# Altium PCB TPSM84824_PCB.PcbDoc
Units mm, origin at the board's own origin, x right, y up, seen from the top; angles counter-clockwise.
Board outline 53.47 x 43.69 mm, 2 copper layers (Top Layer, Bottom Layer); 11 components, 7 nets, 74 pads, 0 vias.
Unrouted connection lines stored in the file: 7.
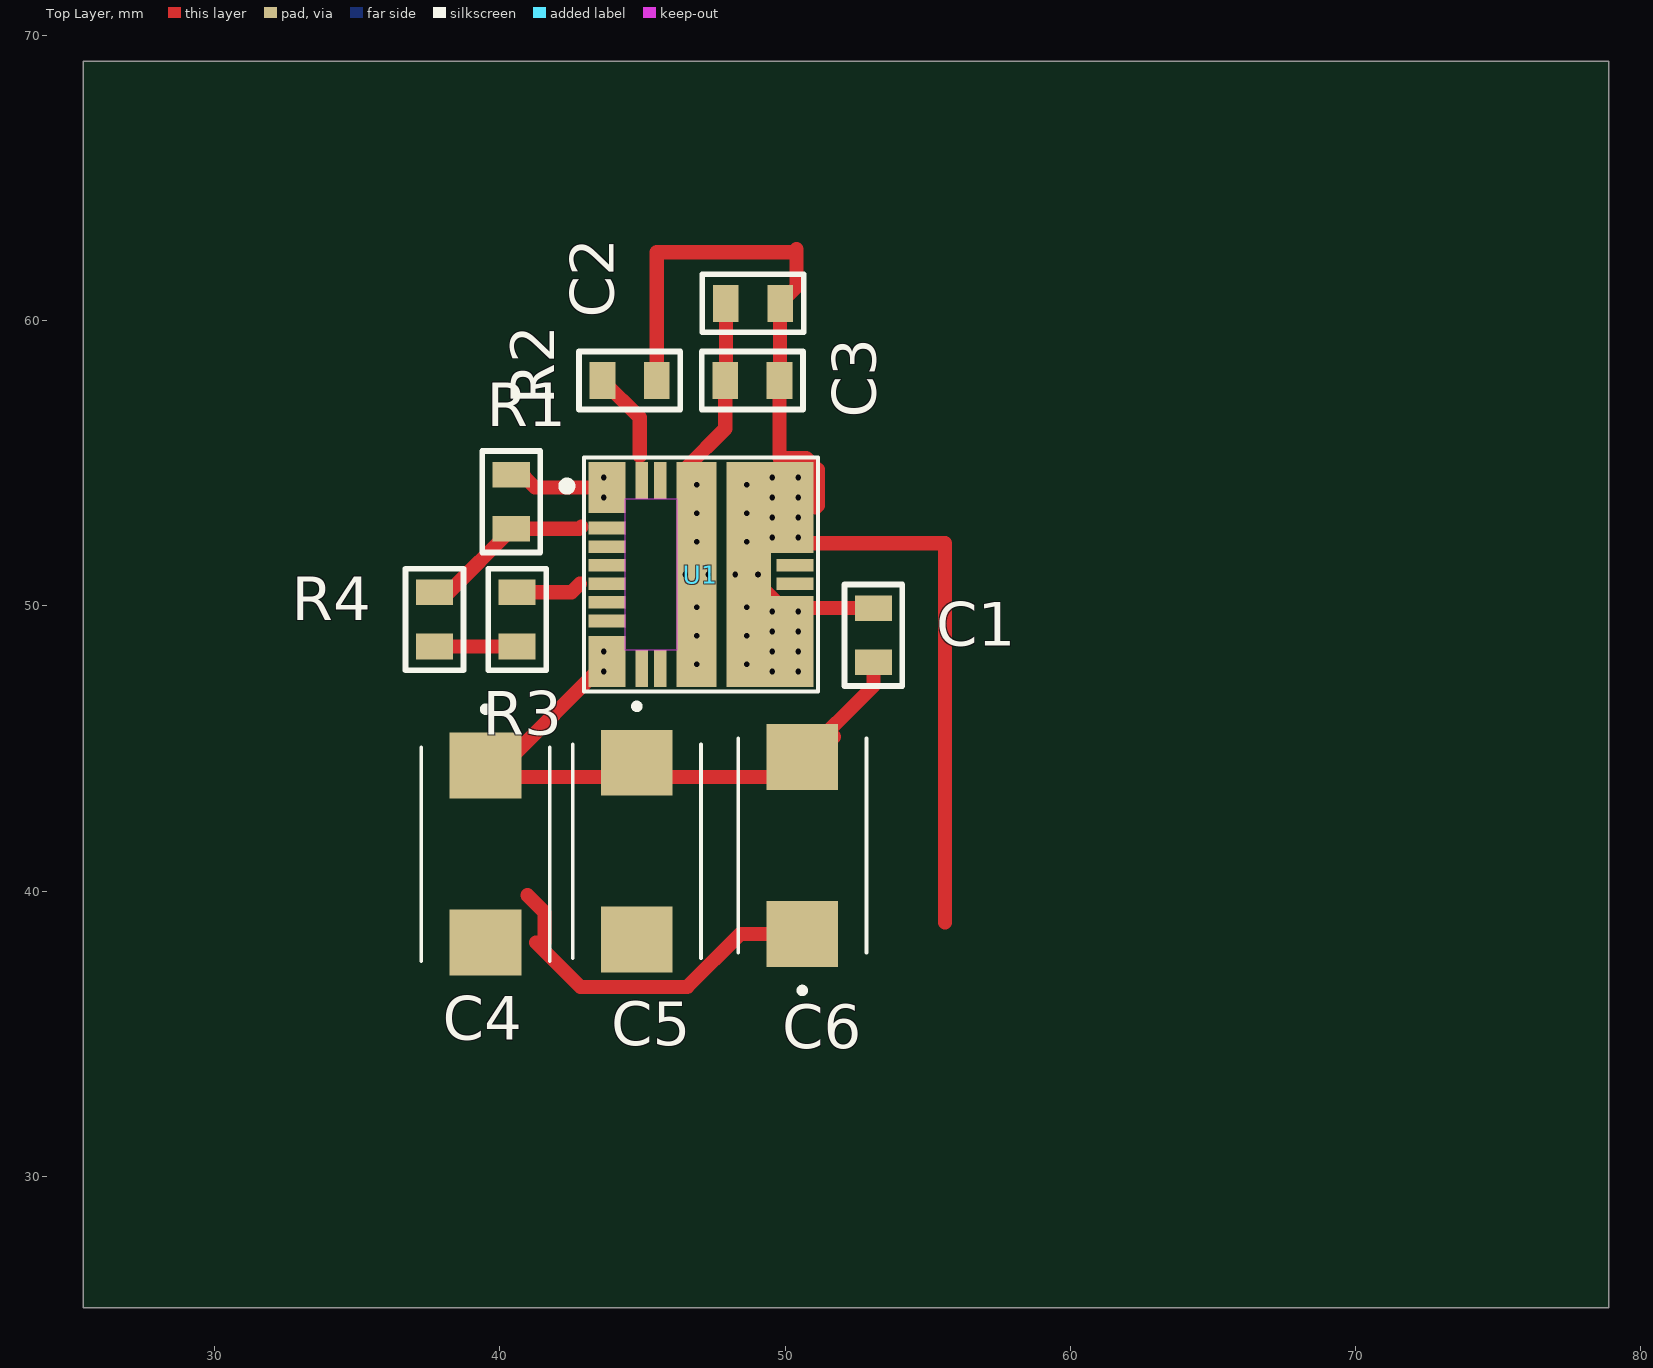
[diagram p0: Top Layer view]
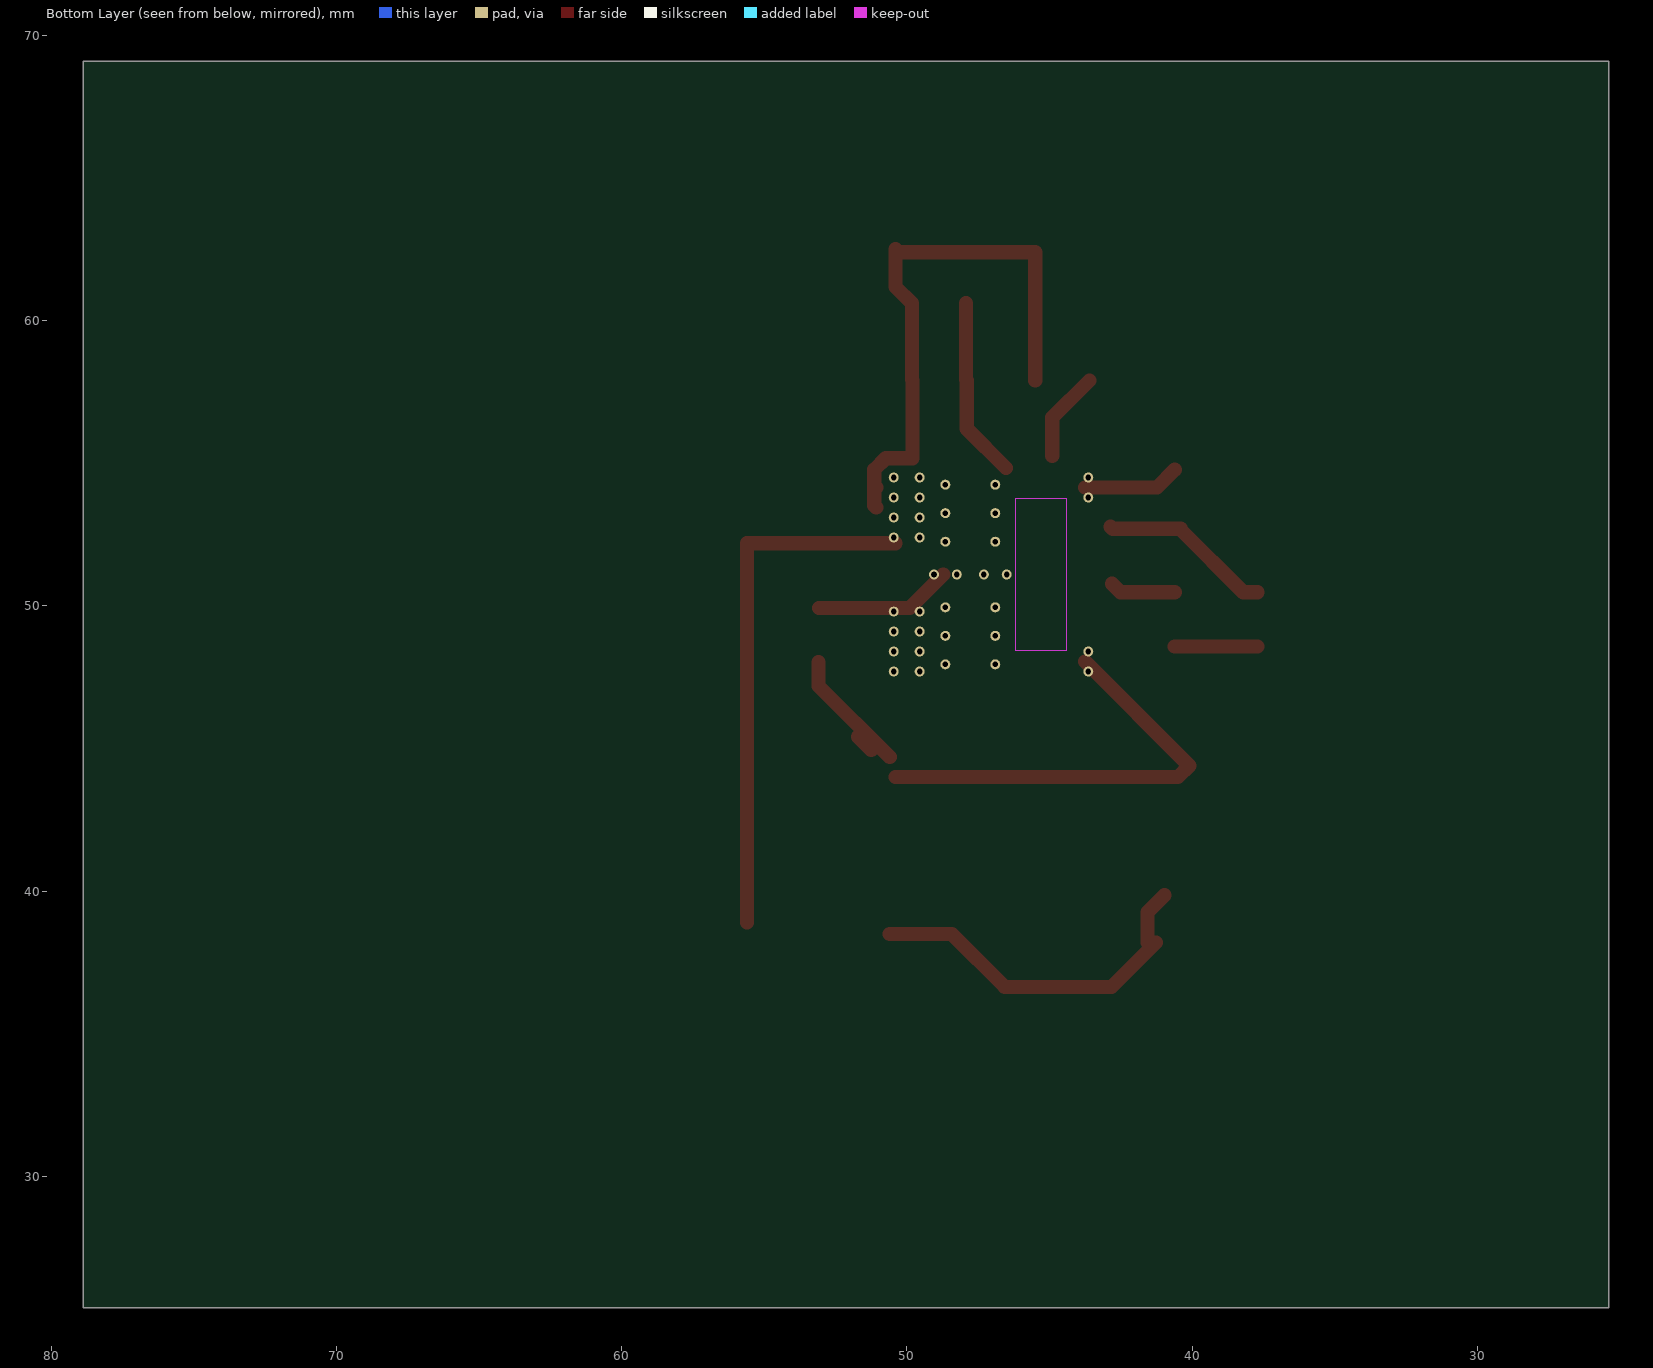
[diagram p1: Bottom Layer view, seen from below]
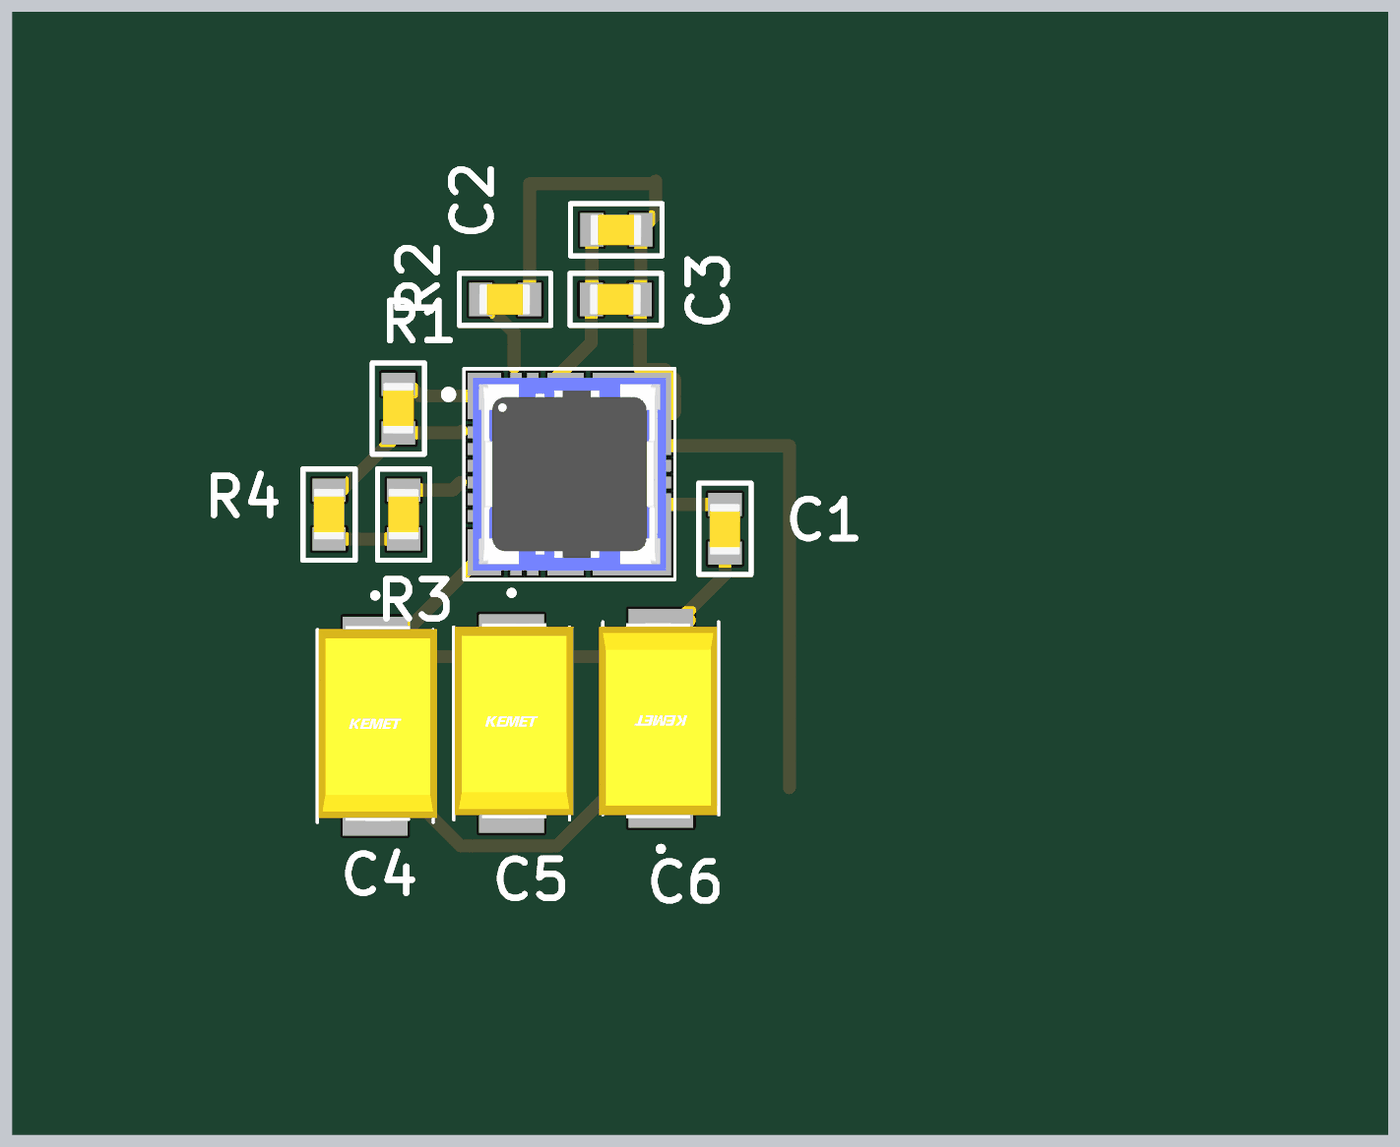
[diagram p2: 3D render of the assembled board from above, using the file's embedded part models]

## Layer stack, top to bottom
Top Solder: solder mask 0.0102, Solder Resist, Dk 3.5
Top Layer: signal copper 0.0356
Dielectric 1: dielectric 0.32, FR-4, Dk 4.8
Bottom Layer: signal copper 0.0356
Bottom Solder: solder mask 0.0102, Solder Resist, Dk 3.5

## Board outline
25.4,25.4 78.867,25.4 78.867,69.088 25.4,69.088

## Design rules (kind name [scope] priority, off if disabled: settings)
Clearance [All] p1: gap=0.254 ignorepadtopadclearanceinfootprint=FALSE except(0: Arc-Hole Track-Hole SMDPad-Hole THPad-Hole Via-Hole Fill-Hole Poly-Hole Region-Hole Text-Hole)
PolygonConnect [All] p1: connectstyle=Relief reliefconductorwidth=0.254 reliefentries=4 polygonreliefangle="90 Angle" airgapwidth=0.254
RoutingVias [All] p1: holewidth=0.711 width=1.27 viastyle="Through Hole" minholewidth=0.711 minwidth=1.27 maxholewidth=0.711 maxwidth=1.27
SolderMaskExpansion [All] p1: expansion=0.102
Width [All] p1: maxlimit=1 minlimit=0.254 preferedwidth=0.254
30 further rules are at their usual default settings.

## Components (designator, comment, footprint, x,y, rotation, side; value= is the part's Value field where it differs from the comment)
C1 "47µF" C/R0805 53.1,48.9 r270 top
C2 "10uF" C/R0805 48.8,60.6 r180 top
C3 "10uF" C/R0805 48.777,57.894 r180 top
C4 "10uF_New" CAPPM7343X310N 39.5,41.3 r270 top
C5 "10uF_New" CAPPM7343X310N 44.8,41.4 r270 top
C6 "10uF_New" CAPPM7343X310N 50.6,41.6 r90 top
R1 "10 kOhms" C/R0805 40.394,53.723 r90 top
R2 "40.2kohm" C/R0805 44.477,57.894 r180 top
R3 "4.42kohm" C/R0805 40.6,49.6 r90 top
R4 "1.37 kOhms" C/R0805 37.7,49.6 r90 top
U1 "TPSM84824MOL" TPSM84424MOLR 47.05,51.1 r0 top

## Footprints (in the part's own frame and the unit in brackets; to place one, negate y for a bottom-side part, rotate by r counter-clockwise, add the part's x,y. Pads: shape width x height; smd on the part's side, far side on the other; paste and mask are expansions set on the pad)
C/R0805 [mm]
  rect 0.9x1.3 smd: 1(-1.023,-0.006) 2(0.877,-0.006)
  silkscreen extent -1.85,-1.02 1.71,1.01, body extent -1.06,-0.61 0.94,0.59, height 0.96
CAPPM7343X310N [mm]
  rect 2.31x2.52 smd: 1(-3.1,0) 2(3.1,0)
  silkscreen extent -5.18,-2.25 3.75,2.25, body extent -3.9,-2.2 3.7,2.4, height 3.11
TPSM84424MOLR [mm]
  rect 1.3x1.8 smd: 1(-3.3,3.05) 8(-3.3,-3.05)
  round 0.35 hole 0.2: 1.1(-3.41,3.4) 1.2(-3.41,2.7) 8.1(-3.41,-2.7) 8.2(-3.41,-3.4) 11.1(-0.15,-3.15) 11.2(-0.15,-2.15) 11.3(-0.15,-1.15) 11.4(-0.15,1.15) 11.5(-0.15,2.15) 11.6(-0.15,3.15) 11.7(-0.55,0) 11.8(0.25,0) G1(1.6,-1.15) G2(1.2,0) G3(2,0) G4(1.6,1.15) G5(1.6,2.15) G6(1.6,3.15) G7(1.6,-2.15) G8(1.6,-3.15) G9(2.5,-3.4) G10(2.5,-2.7) G11(2.5,-2) G12(2.5,-1.3) G13(3.41,-1.3) G14(3.41,-2) G15(2.5,2) G16(2.5,1.3) G18(2.5,2.7) G19(2.5,3.4) G20(3.41,3.4) G21(3.41,2.7) G22(3.41,2) G23(3.41,1.3) G24(3.41,-2.7) G25(3.41,-3.4)
  rect 1.3x0.45 smd: 2(-3.3,1.625) 3(-3.3,0.975) 4(-3.3,0.325) 5(-3.3,-0.325) 6(-3.3,-0.975) 7(-3.3,-1.625) 16(3.3,-0.325) 17(3.3,0.325)
  rect 0.45x1.3 smd: 9(-2.075,-3.3) 10(-1.425,-3.3) 23(-1.425,3.3) 24(-2.075,3.3)
  rect 1.4x7.9 smd: 11(-0.15,0)
  rect 1.5x3.2 smd: 13(3.2,-2.35) 20(3.2,2.35)
  rect 1.55x7.9 smd: 21(1.675,0)
  Keep-Out Layer region: -2.651,2.65 -0.85,2.65 -0.85,-2.651 -2.651,-2.651
  Keep-Out Layer region: -2.651,2.65 -0.85,2.65 -0.85,-2.651 -2.651,-2.651
  Keep-Out Layer region: -2.651,2.65 -0.85,2.65 -0.85,-2.651 -2.651,-2.651
  silkscreen extent -4.85,-4.1 4.1,4.1, body extent -3.75,-3.75 3.75,3.75, height 5.4

## Part data
C1: library part GRM21BR60J476ME15K, "47μF 6.3V Ceramic Capacitor X5R 0805 (2012 Metric) 0.079\" L x 0.049\" W (2.00mm x 1.25mm)", Capacitance=47μF, Manufacturer=Murata, Operating Temperature="-55°C ~ 85°C", Package / Case="0805 (2012 Metric)", Ratings=-, Temperature Coefficient=X5R, Tolerance=±20%, Voltage - Rated=6.3V, Applications="General Purpose", Categories=Capacitors, ComponentLink1Description=http://www.mouser.com/ds/2/281/c02e-2905.pdf?src-supplier=Mouser, ComponentLink1URL=http://www.mouser.com/ds/2/281/c02e-2905.pdf?src-supplier=Mouser, ComponentLink2Description=https://search.murata.co.jp/Ceramy/image/img/A01X/G101/ENG/GRM21BR60J476ME15-01.pdf?src-supplier=Digi-Key, ComponentLink2URL=https://search.murata.co.jp/Ceramy/image/img/A01X/G101/ENG/GRM21BR60J476ME15-01.pdf?src-supplier=Digi-Key, Features=-, Height - Seated (Max)=-, Lead Spacing=-, Lead Style=-, Manufacturer Part Number=GRM21BR60J476ME15K, Mounting Type="Surface Mount, MLCC", Packaging="Tape & Reel (TR)", Part Status="Not For New Designs", Pricing 1="1=0.48, 10=0.339, 100=0.2236, 500=0.1656, 1000=0.1408, 2500=0.1325, 5000=0.1242 (USD)", Series=GRM, Size / Dimension="0.079 L x 0.049 W (2.00mm x 1.25mm)", Stock 1=16872, Supplier 1=Digi-Key, Thickness (Max)="0.057 (1.45mm)"
C2 C3: library part C0805C106K8PACTU, "CAP CER 10UF 10V X5R 0805", Capacitance Value="10 uF", Dielectric=X5R, Manufacturer=KEMET, Operating Temperature="-55 to 85 °C", Package/Case=0805, Tolerance="10 %", Voltage="10 Vdc", Category="Capacitor Ceramic Multilayer", ComponentLink1Description=http://www.farnell.com/datasheets/2739827.pdf?src-supplier=Element14, ComponentLink1URL=http://www.farnell.com/datasheets/2739827.pdf?src-supplier=Element14, ComponentLink2Description=http://www.farnell.com/datasheets/40889.pdf?src-supplier=Element14, ComponentLink2URL=http://www.farnell.com/datasheets/40889.pdf?src-supplier=Element14, Construction=Flat, Manufacturer Part Number=C0805C106K8PACTU, Mounting="Surface Mount", Pricing 1="1=0.16, 10=0.117, 100=0.055, 500=0.0386, 1000=0.0319 (USD)", Product Height="1.25 mm", Product Length="2 mm", Stock 1=872414, Supplier 1=Digi-Key
C4 C5 C6: library part T495D106M035ATE125, "CAP TANT 10UF 35V 20% 2917", Capacitance=10μF, Capacitance Tolerance="± 20%", Capacitor Case Style="2917 ^7343 Metric]", Manufacturer=KEMET, Operating Temperature Max=125°C, Operating Temperature Min=-55°C, Voltage Rating=35V, ComponentLink1Description=https://www.verical.com/server-webapp/html/getDatasheet?partID=44813&src-supplier=Verical, ComponentLink1URL=https://www.verical.com/server-webapp/html/getDatasheet?partID=44813&src-supplier=Verical, ComponentLink2Description=http://www.farnell.com/datasheets/1761160.pdf?src-supplier=Element14, ComponentLink2URL=http://www.farnell.com/datasheets/1761160.pdf?src-supplier=Element14, ComponentLink3Description=http://www.farnell.com/datasheets/1744560.pdf?src-supplier=Element14, ComponentLink3URL=http://www.farnell.com/datasheets/1744560.pdf?src-supplier=Element14, ESR=0.125ohm, Manufacturer Part Number=T495D106M035ATE125, Packaging="Full Reel", Pricing 1="1=1.79, 10=1.449, 100=1.1066 (USD)", Product Range="KEMET - T495 Series", Stock 1=5675, Supplier 1=Digi-Key
R1: library part RC0805FR-0710KL, "RES SMD 10K OHM 1% 1/8W 0805", Case Code - in=0805, Case Code - mm=2012, Manufacturer=Yageo, Operating Temperature Range="- 55 C to + 155 C", Power Rating="125 mW (1/8 W)", Temperature Coefficient="100 PPM / C", Tolerance="1 %", Voltage Rating="150 V", ComponentLink1Description=http://www.yageo.com/documents/recent/PYu-RC_Group_51_RoHS_L_9.pdf?src-supplier=Mouser, ComponentLink1URL=http://www.yageo.com/documents/recent/PYu-RC_Group_51_RoHS_L_9.pdf?src-supplier=Mouser, ComponentLink2Description=http://www.farnell.com/datasheets/2167052.pdf?src-supplier=Element14, ComponentLink2URL=http://www.farnell.com/datasheets/2167052.pdf?src-supplier=Element14, ComponentLink3Description=http://www.yageo.com/documents/recent/PYu-RC_Group_51_RoHS_L_10.pdf?src-supplier=Digi-Key, ComponentLink3URL=http://www.yageo.com/documents/recent/PYu-RC_Group_51_RoHS_L_10.pdf?src-supplier=Digi-Key, ComponentLink4Description=http://www.yageo.ru/pdf/RC0805.pdf?src-supplier=Future+Electronics, ComponentLink4URL=http://www.yageo.ru/pdf/RC0805.pdf?src-supplier=Future+Electronics, Manufacturer Part Number=RC0805FR-0710KL, Packaging=Reel, Pricing 1="1=0.1, 10=0.036, 100=0.0147, 1000=0.0066, 2500=0.0057 (USD)", Product="Thick Film Resistors General Purpose", Resistance="10 kOhms", Series=RC, Stock 1=37419702, Supplier 1=Digi-Key, Termination Style=SMD/SMT
R2: library part ERA-6AEB4022V, "Res Thin Film 0805 40.2K Ohm 0.1% 1/8W 25ppm/C Molded SMD SMD Punched Carrier T/R", Manufacturer=Panasonic, Operating Temperature Max=155°C, Operating Temperature Min=-55°C, Operating Temperature Range="-55°C to +155°C", Power Rating=125mW, Resistance Tolerance="± 0.1%", Resistor Case Style="0805 [2012 Metric]", Resistor Element Material="Thin Film", Resistor Mounting=SMD, Temperature Coefficient="± 25ppm/°C", Voltage Rating=100V, ComponentLink1Description=http://uk.rs-online.com/webdocs/0eb1/0900766b80eb1d8c.pdf?src-supplier=RSComponents, ComponentLink1URL=http://uk.rs-online.com/webdocs/0eb1/0900766b80eb1d8c.pdf?src-supplier=RSComponents, ComponentLink2Description=http://industrial.panasonic.com/www-data/pdf/AOA0000/AOA0000CE26.pdf?src-supplier=Avnet+Europe, ComponentLink2URL=http://industrial.panasonic.com/www-data/pdf/AOA0000/AOA0000CE26.pdf?src-supplier=Avnet+Europe, ComponentLink3Description=http://www.farnell.com/datasheets/485442.pdf?src-supplier=Farnell, ComponentLink3URL=http://www.farnell.com/datasheets/485442.pdf?src-supplier=Farnell, ComponentLink4Description=http://www.farnell.com/datasheets/485442.pdf?src-supplier=Element14, ComponentLink4URL=http://www.farnell.com/datasheets/485442.pdf?src-supplier=Element14, ComponentLink5Description=http://www.mouser.com/ds/2/315/AOA0000CE26-32660.pdf?src-supplier=Mouser, ComponentLink5URL=http://www.mouser.com/ds/2/315/AOA0000CE26-32660.pdf?src-supplier=Mouser, ComponentLink6Description=http://industrial.panasonic.com/www-data/pdf/AOA0000/AOA0000CE26.pdf?src-supplier=Avnet, ComponentLink6URL=http://industrial.panasonic.com/www-data/pdf/AOA0000/AOA0000CE26.pdf?src-supplier=Avnet, ComponentLink7Description=https://produktinfo.conrad.com/datenblaetter/450000-474999/458496-da-01-en-WIDERSTAND_0805_ERA.pdf?src-supplier=Conrad, ComponentLink7URL=https://produktinfo.conrad.com/datenblaetter/450000-474999/458496-da-01-en-WIDERSTAND_0805_ERA.pdf?src-supplier=Conrad, External Depth=1.25mm, External Length / Height=0.5mm, External Width=2mm, Manufacturer Part Number=ERA-6AEB4022V, No. of Pins=2, Packaging=Reel, Pricing 1="1=0.36, 10=0.302, 100=0.1182, 1000=0.0495, 2500=0.0454 (USD)", Product Range="PANASONIC - ERA Series Metal Film Chip Resistor", Resistance=40.2kohm, Series=ERA, Stock 1=45354, Supplier 1=Digi-Key
R3: library part ERA-6AEB4421V, "Panasonic ERA Series Thin Film Surface Mount Fixed Resistor 0805 Case 4.42k 0.1% 0.125W 25ppm/C", Manufacturer=Panasonic, Operating Temperature Max=155°C, Operating Temperature Min=-55°C, Operating Temperature Range="-55°C to +155°C", Power Rating=125mW, Resistance Tolerance="± 0.1%", Resistor Case Style="0805 [2012 Metric]", Resistor Element Material="Thin Film", Resistor Mounting=SMD, Temperature Coefficient="± 25ppm/°C", Voltage Rating=100V, ComponentLink1Description=http://uk.rs-online.com/webdocs/0eb1/0900766b80eb1d8c.pdf?src-supplier=RSComponents, ComponentLink1URL=http://uk.rs-online.com/webdocs/0eb1/0900766b80eb1d8c.pdf?src-supplier=RSComponents, ComponentLink2Description=http://www.farnell.com/datasheets/485442.pdf?src-supplier=Farnell, ComponentLink2URL=http://www.farnell.com/datasheets/485442.pdf?src-supplier=Farnell, ComponentLink3Description=http://www.farnell.com/datasheets/485442.pdf?src-supplier=Element14, ComponentLink3URL=http://www.farnell.com/datasheets/485442.pdf?src-supplier=Element14, ComponentLink4Description=http://industrial.panasonic.com/www-data/pdf/AOA0000/AOA0000CE26.pdf?src-supplier=Avnet, ComponentLink4URL=http://industrial.panasonic.com/www-data/pdf/AOA0000/AOA0000CE26.pdf?src-supplier=Avnet, ComponentLink5Description=http://www.produktinfo.conrad.com/datenblaetter/1100000-1199999/001181285-da-01-en-WIDERSTAND_ERA_0805_4K42_0_1__5000ST.pdf?src-supplier=Conrad, ComponentLink5URL=http://www.produktinfo.conrad.com/datenblaetter/1100000-1199999/001181285-da-01-en-WIDERSTAND_ERA_0805_4K42_0_1__5000ST.pdf?src-supplier=Conrad, External Depth=1.25mm, External Length / Height=0.5mm, External Width=2mm, Manufacturer Part Number=ERA-6AEB4421V, No. of Pins=2, Packaging=Reel, Pricing 1="1=0.36, 10=0.302, 100=0.1182, 1000=0.0495, 2500=0.0454 (USD)", Product Range="PANASONIC - ERA", Resistance=4.42kohm, Series=ERA, Stock 1=10445, Supplier 1=Digi-Key
R4: library part RC0805FR-071K37L, "RES SMD 1.37K OHM 1% 1/16W 0402", Case Code - in=0402, Case Code - mm=1005, Manufacturer=Vishay, Manufacturer Part Number=CRCW04021K37FKED, Operating Temperature Range="- 55 C to + 155 C", Package / Case="0402 (1005 metric)", Power Rating="63 mW", Temperature Coefficient="100 PPM / K", Tolerance="1 %", Voltage Rating="50 V", Brand="Vishay / Dale", ComponentLink1Description=http://www.vishay.com/docs/20035/dcrcwe3.pdf?src-supplier=Digi-Key, ComponentLink1URL=http://www.vishay.com/docs/20035/dcrcwe3.pdf?src-supplier=Digi-Key, ComponentLink2Description=http://www.vishay.com/docs/20035/dcrcwe3.pdf?src-supplier=Avnet, ComponentLink2URL=http://www.vishay.com/docs/20035/dcrcwe3.pdf?src-supplier=Avnet, ComponentLink3Description=http://www.farnell.com/datasheets/1697337.pdf?src-supplier=Element14, ComponentLink3URL=http://www.farnell.com/datasheets/1697337.pdf?src-supplier=Element14, ComponentLink4Description=http://www.farnell.com/datasheets/2310790.pdf?src-supplier=Farnell, ComponentLink4URL=http://www.farnell.com/datasheets/2310790.pdf?src-supplier=Farnell, ComponentLink5Description=http://www.mouser.com/ds/2/427/dcrcwe3-109170.pdf?src-supplier=Mouser, ComponentLink5URL=http://www.mouser.com/ds/2/427/dcrcwe3-109170.pdf?src-supplier=Mouser, ComponentLink6Description=http://www.farnell.com/datasheets/2111203.pdf?src-supplier=Element14, ComponentLink6URL=http://www.farnell.com/datasheets/2111203.pdf?src-supplier=Element14, ComponentLink7Description=http://www.vishay.com/docs/20035/dcrcwe3.pdf?src-supplier=Future+Electronics, ComponentLink7URL=http://www.vishay.com/docs/20035/dcrcwe3.pdf?src-supplier=Future+Electronics, ComponentLink8Description=http://www.farnell.com/datasheets/2045674.pdf?src-supplier=Element14, ComponentLink8URL=http://www.farnell.com/datasheets/2045674.pdf?src-supplier=Element14, ComponentLink9Description=https://www.alliedelec.com/m/d/0c934d6939ccefa68dbe0b96d821c8cf.pdf?src-supplier=Allied+Electronics, ComponentLink9URL=https://www.alliedelec.com/m/d/0c934d6939ccefa68dbe0b96d821c8cf.pdf?src-supplier=Allied+Electronics, Factory Pack Quantity=10000, Height="0.35 mm", Length="1 mm", Packaging=Reel, Pricing 1="1=0.1, 10=0.038, 100=0.0154, 1000=0.0069, 2500=0.006, 5000=0.005 (USD)", Product="Thick Film Resistors SMD", Product Category="Thick Film Resistors - SMD", Resistance="1.37 kOhms", RoHS=Details, Series=CRCW, Stock 1=47266, Supplier 1=Digi-Key, Termination Style=SMD/SMT, Unit Weight="0.000023 oz", Width="0.5 mm"
U1: "DC DC CONVERTER 0.6-10V", Current - Output (Max)=8A, Manufacturer="Texas Instruments", Manufacturer Part Number=TPSM84824MOLR, Operating Temperature="-40°C ~ 105°C", Package / Case="24-SMD Module", Supplier Device Package="24-QFM (7.5x7.5)", Voltage - Input (Max)=17V, Voltage - Input (Min)=4.5V, Voltage - Output 1="0.6 ~ 10 V", Voltage - Output 2=-, Applications="ITE (Commercial)", Categories="Power Supplies - Board Mount", ComponentLink1Description=http://www.ti.com/lit/ds/symlink/tpsm84824.pdf?src-supplier=Digi-Key, ComponentLink1URL=http://www.ti.com/lit/ds/symlink/tpsm84824.pdf?src-supplier=Digi-Key, Efficiency=94%, Features="OCP, OTP, UVLO", Mounting Type="Surface Mount", Number of Outputs=1, Packaging="Cut Tape (CT)", Part Status=Active, Pricing 1="1=11.33, 10=10.409, 100=8.3593 (USD)", Series=-, Size / Dimension="0.30 L x 0.30 W x 0.21 H (7.5mm x 7.5mm x 5.4mm)", Stock 1=469, Supplier 1=Digi-Key, Type="Non-Isolated PoL Module", Voltage - Output 3=-, Voltage - Output 4=-

## Nets (pads, with @x,y where several pads share a name; then routed paths per layer and width w, separated by ;. In a path a pad name is that pad's centre, name@x,y a point inside that pad or via, vN(x,y) a via of type N, cw(c..) or ccw(c..) an arc to the next point about the centre after c; other vN are vias at no path point)
GND: C2.1 C3.1 R2.1 R3.1 R4.1 U1.3 U1.9 U1.13 U1.20 U1.21 | length 27.7
  Top Layer w0.5: R4.1 R3.1 ; R2.1 45.5,62.4 50.3,62.4 50.4,62.5 50.4,61.183 C2.1 49.823,57.923 C3.1 49.8,55.179 50.179,55.179 50.25,55.179 50.741,55.179 51.139,54.781 51.139,54.219 51.07,54.15 51.139,54.081 51.139,53.519 51.07,53.45 ; U1.21 49.902,49.923 53.077,49.923
NetR1_1: R1.1 R4.2 U1.2 | length 6.1
  Top Layer w0.5: R4.2 38.206,50.477 R1.1@40.429,52.7 ; R1.1 R1.1@40.429,52.7 ; 42.862,52.775 42.787,52.7 R1.1@40.429,52.7
NetR2_2: R2.2 U1.24 | length 3.2
  Top Layer w0.5: R2.2 44.9,56.6 44.9,55.263
NetR3_2: R3.2 U1.5 | length 2.3
  Top Layer w0.5: R3.2 42.514,50.477 42.812,50.775
NetU1_16: U1.16 U1.17
Vin: C2.2 C3.2 U1.11 | length 6.4
  Top Layer w0.5: U1.11@46.523,54.833 47.9,56.21 C3.2 47.923,57.923 C2.2
Vout: R1.2 U1.1 U1.8 | length 19
  Top Layer w0.5: R1.2@40.606,54.777 41.233,54.15 U1.1 ; U1.8 40.1,44.4 40.5,44 50.4,44
pads on no net: C1.1 C1.2 C4.1 C4.2 C5.1 C5.2 C6.1 C6.2 U1.1.1 U1.1.2 U1.4 U1.6 U1.7 U1.8.1 U1.8.2 U1.10 U1.11.1 U1.11.2 U1.11.3 U1.11.4 U1.11.5 U1.11.6 U1.11.7 U1.11.8 U1.23 U1.G1 U1.G2 U1.G3 U1.G4 U1.G5 U1.G6 U1.G7 U1.G8 U1.G9 U1.G10 U1.G11 U1.G12 U1.G13 U1.G14 U1.G15 U1.G16 U1.G18 U1.G19 U1.G20 U1.G21 U1.G22 U1.G23 U1.G24 U1.G25
copper on no net: | length 36.5
  Top Layer w0.5: 40.969,39.859 41.564,39.264 41.564,38.2 41.264,38.2 42.823,36.641 46.564,36.641 48.423,38.5 50.6,38.5 ; 50.4,52.2 55.6,52.2 55.6,38.9 ; 50.6,44.7 53.094,47.194 53.094,48.023 ; 51.25,44.95 51.711,45.411